# Altium PCB STM.PcbDoc
Units mm, origin at the board's own origin, x right, y up, seen from the top; angles counter-clockwise.
Board outline 35.75 x 36 mm, 4 copper layers (L1 (Signal), L2 (GND), L3 (GND), L4 (Signal)), stack 1.57 mm thick; 34 components, 27 nets, 170 pads, 116 vias.
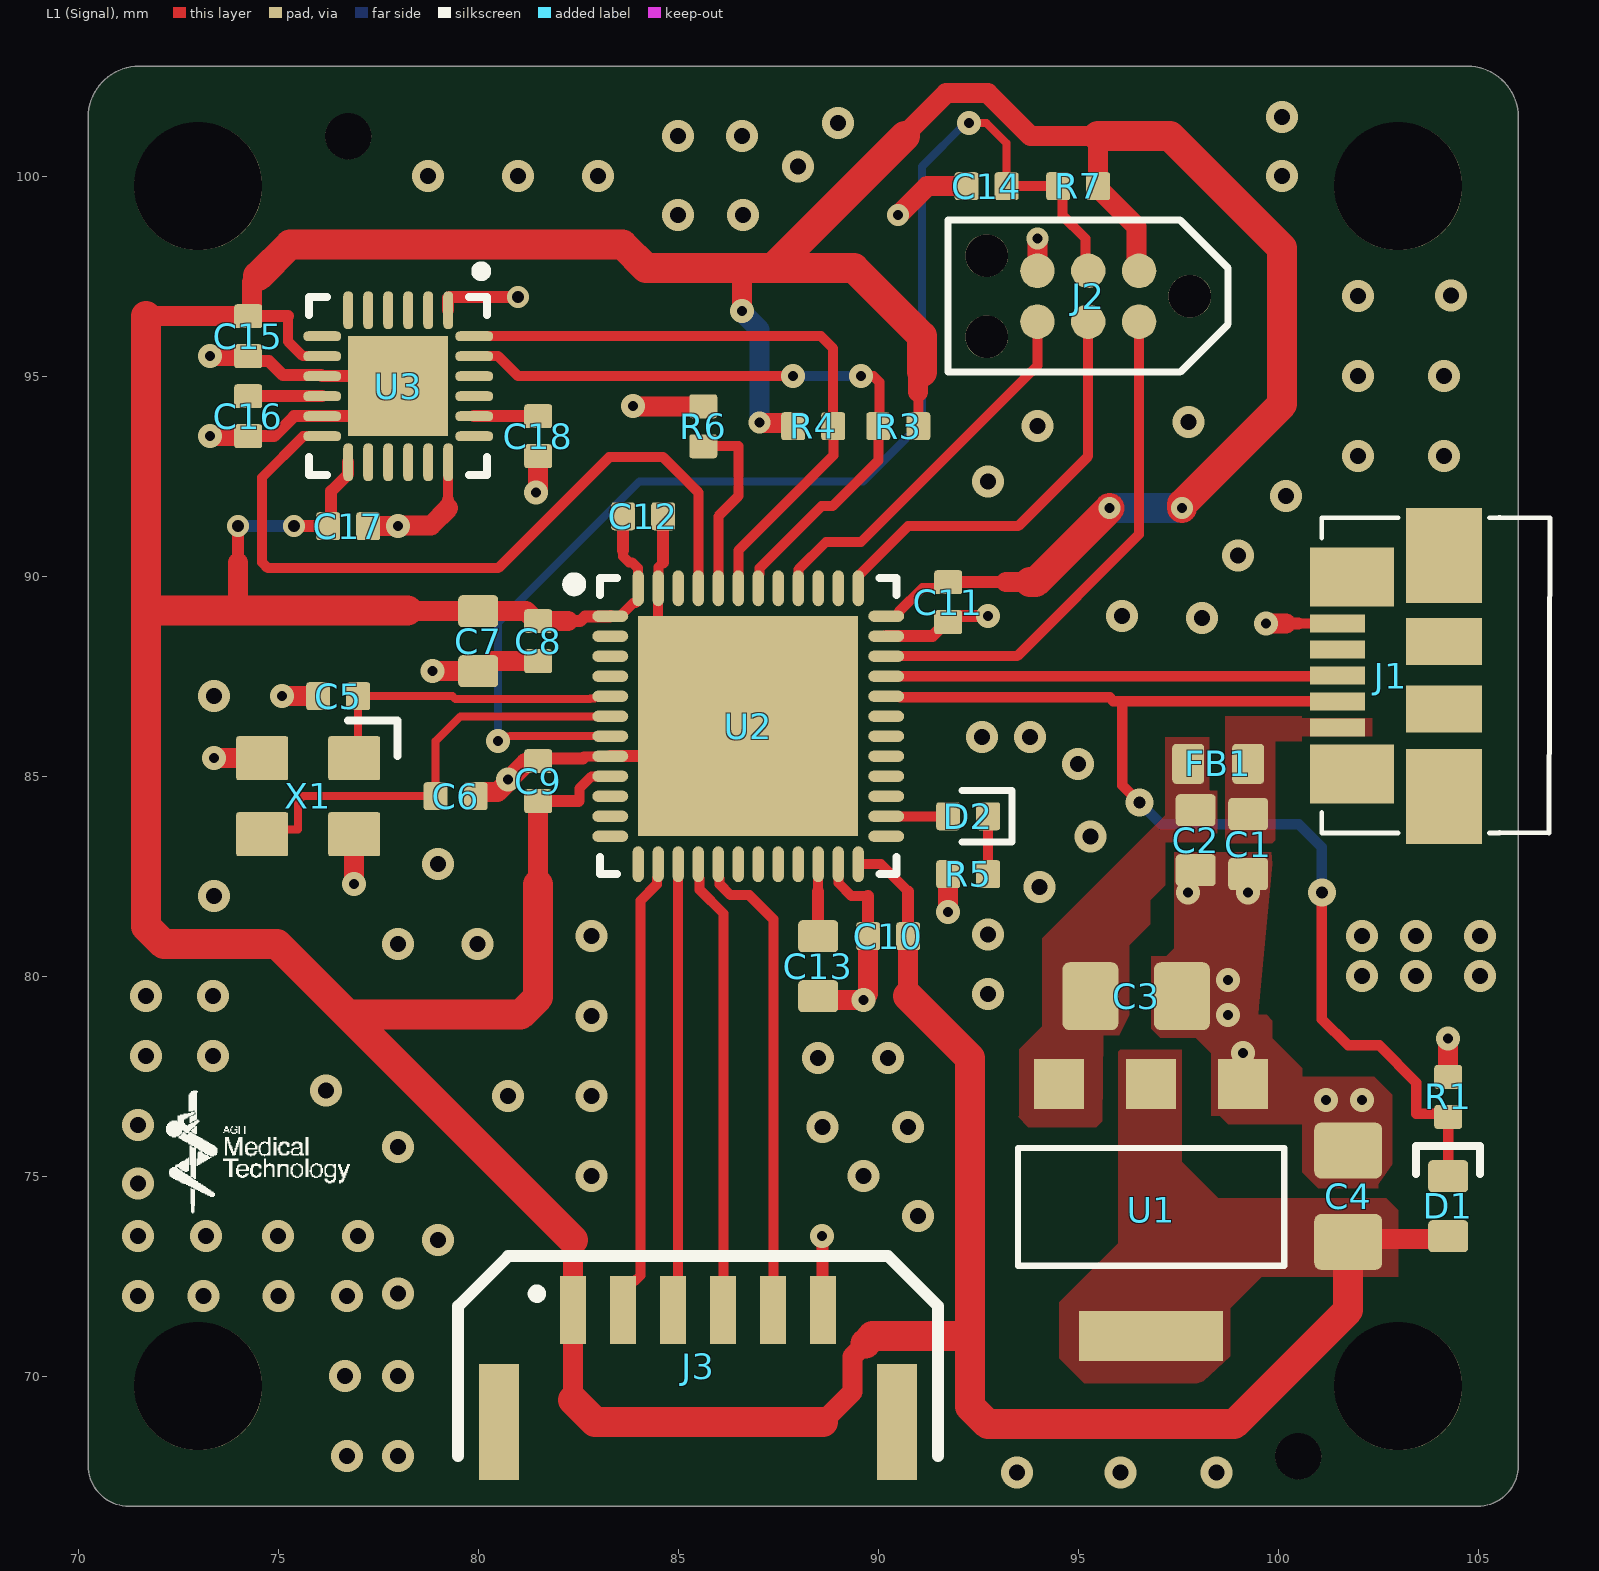
[diagram p0: L1 (Signal) view]
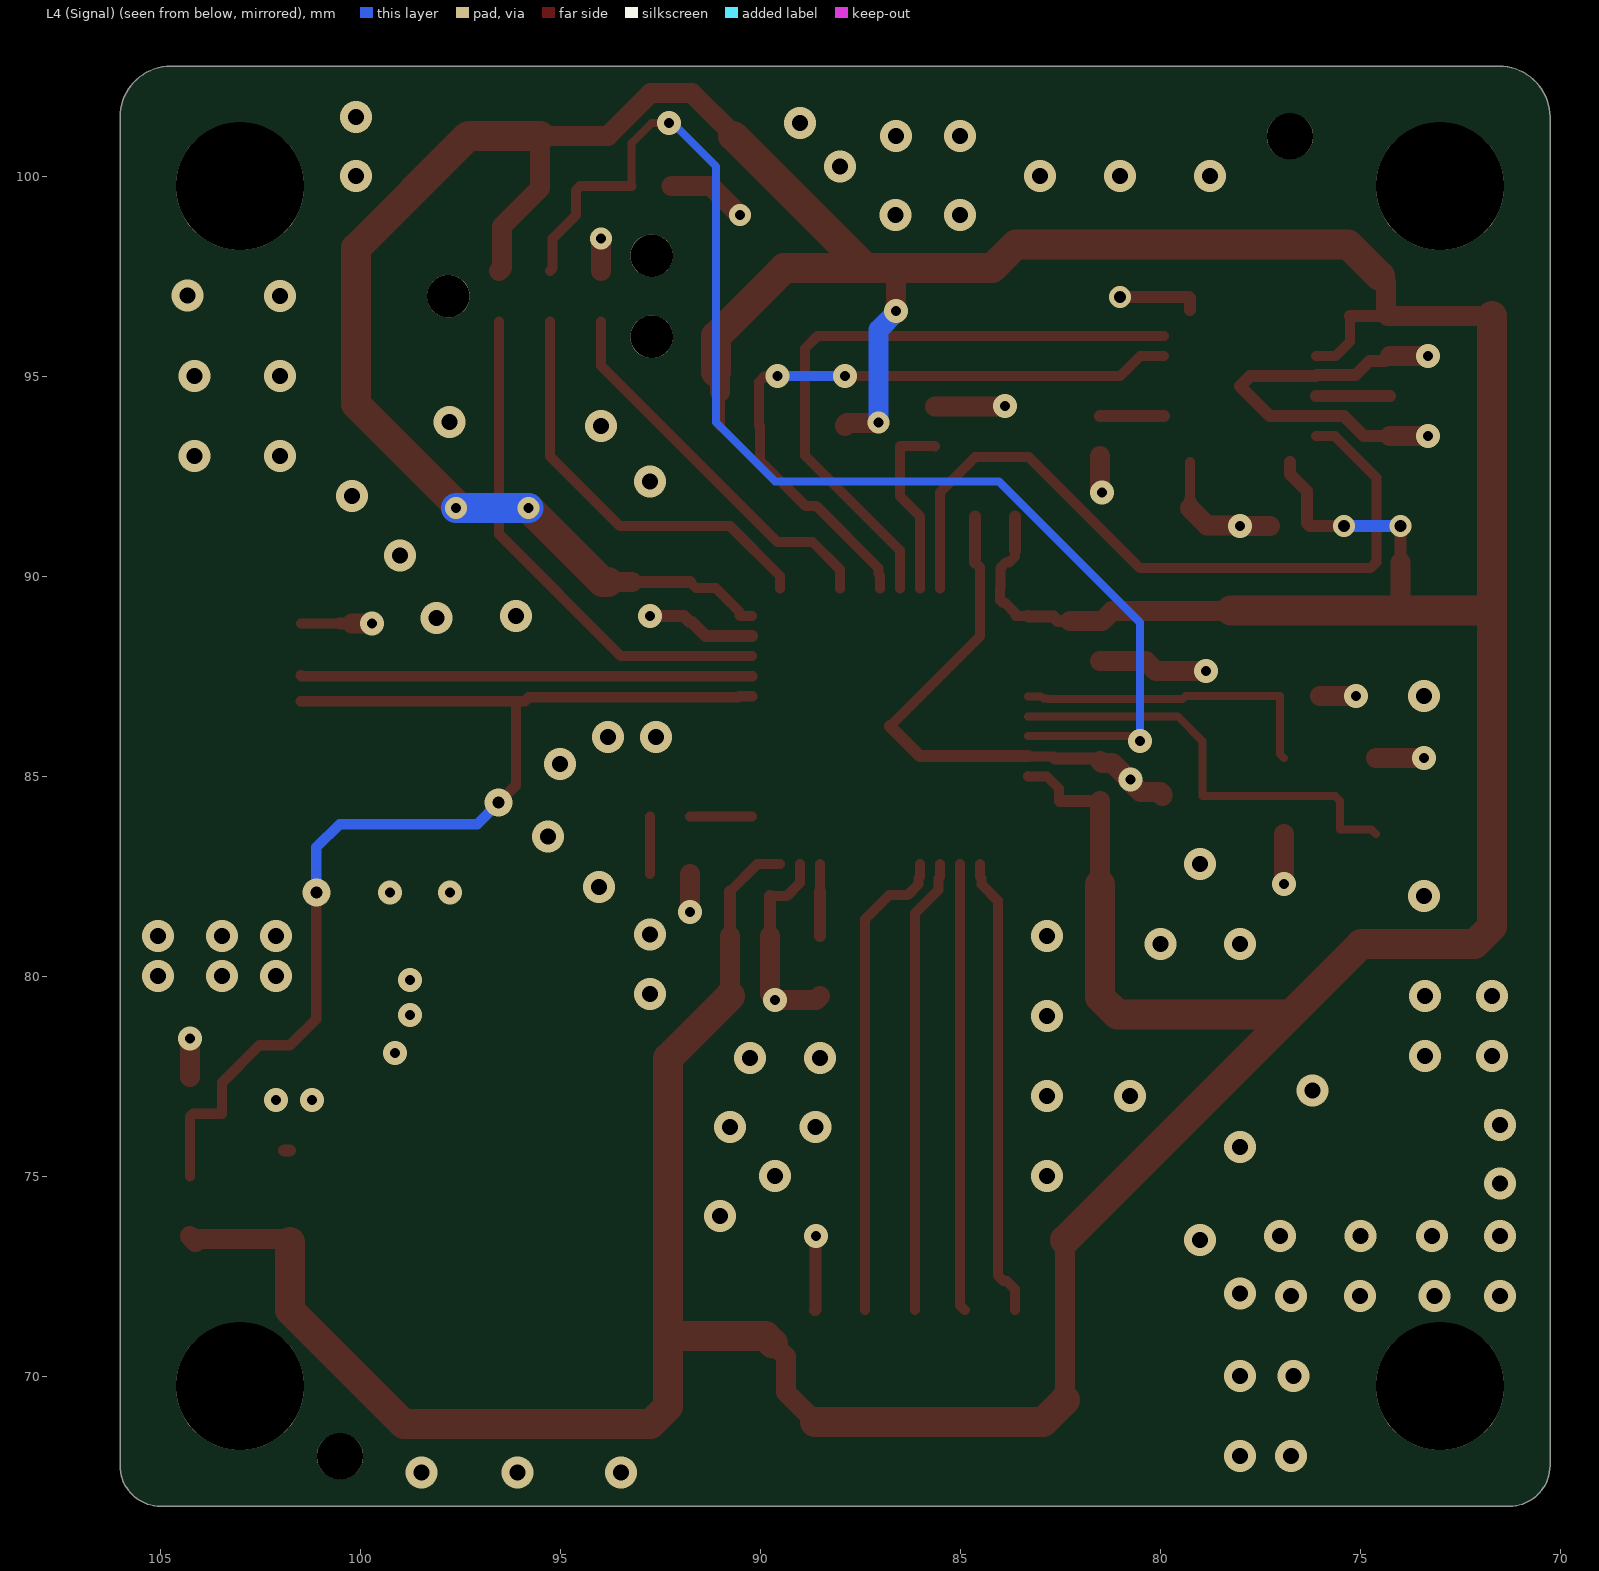
[diagram p1: L4 (Signal) view, seen from below]
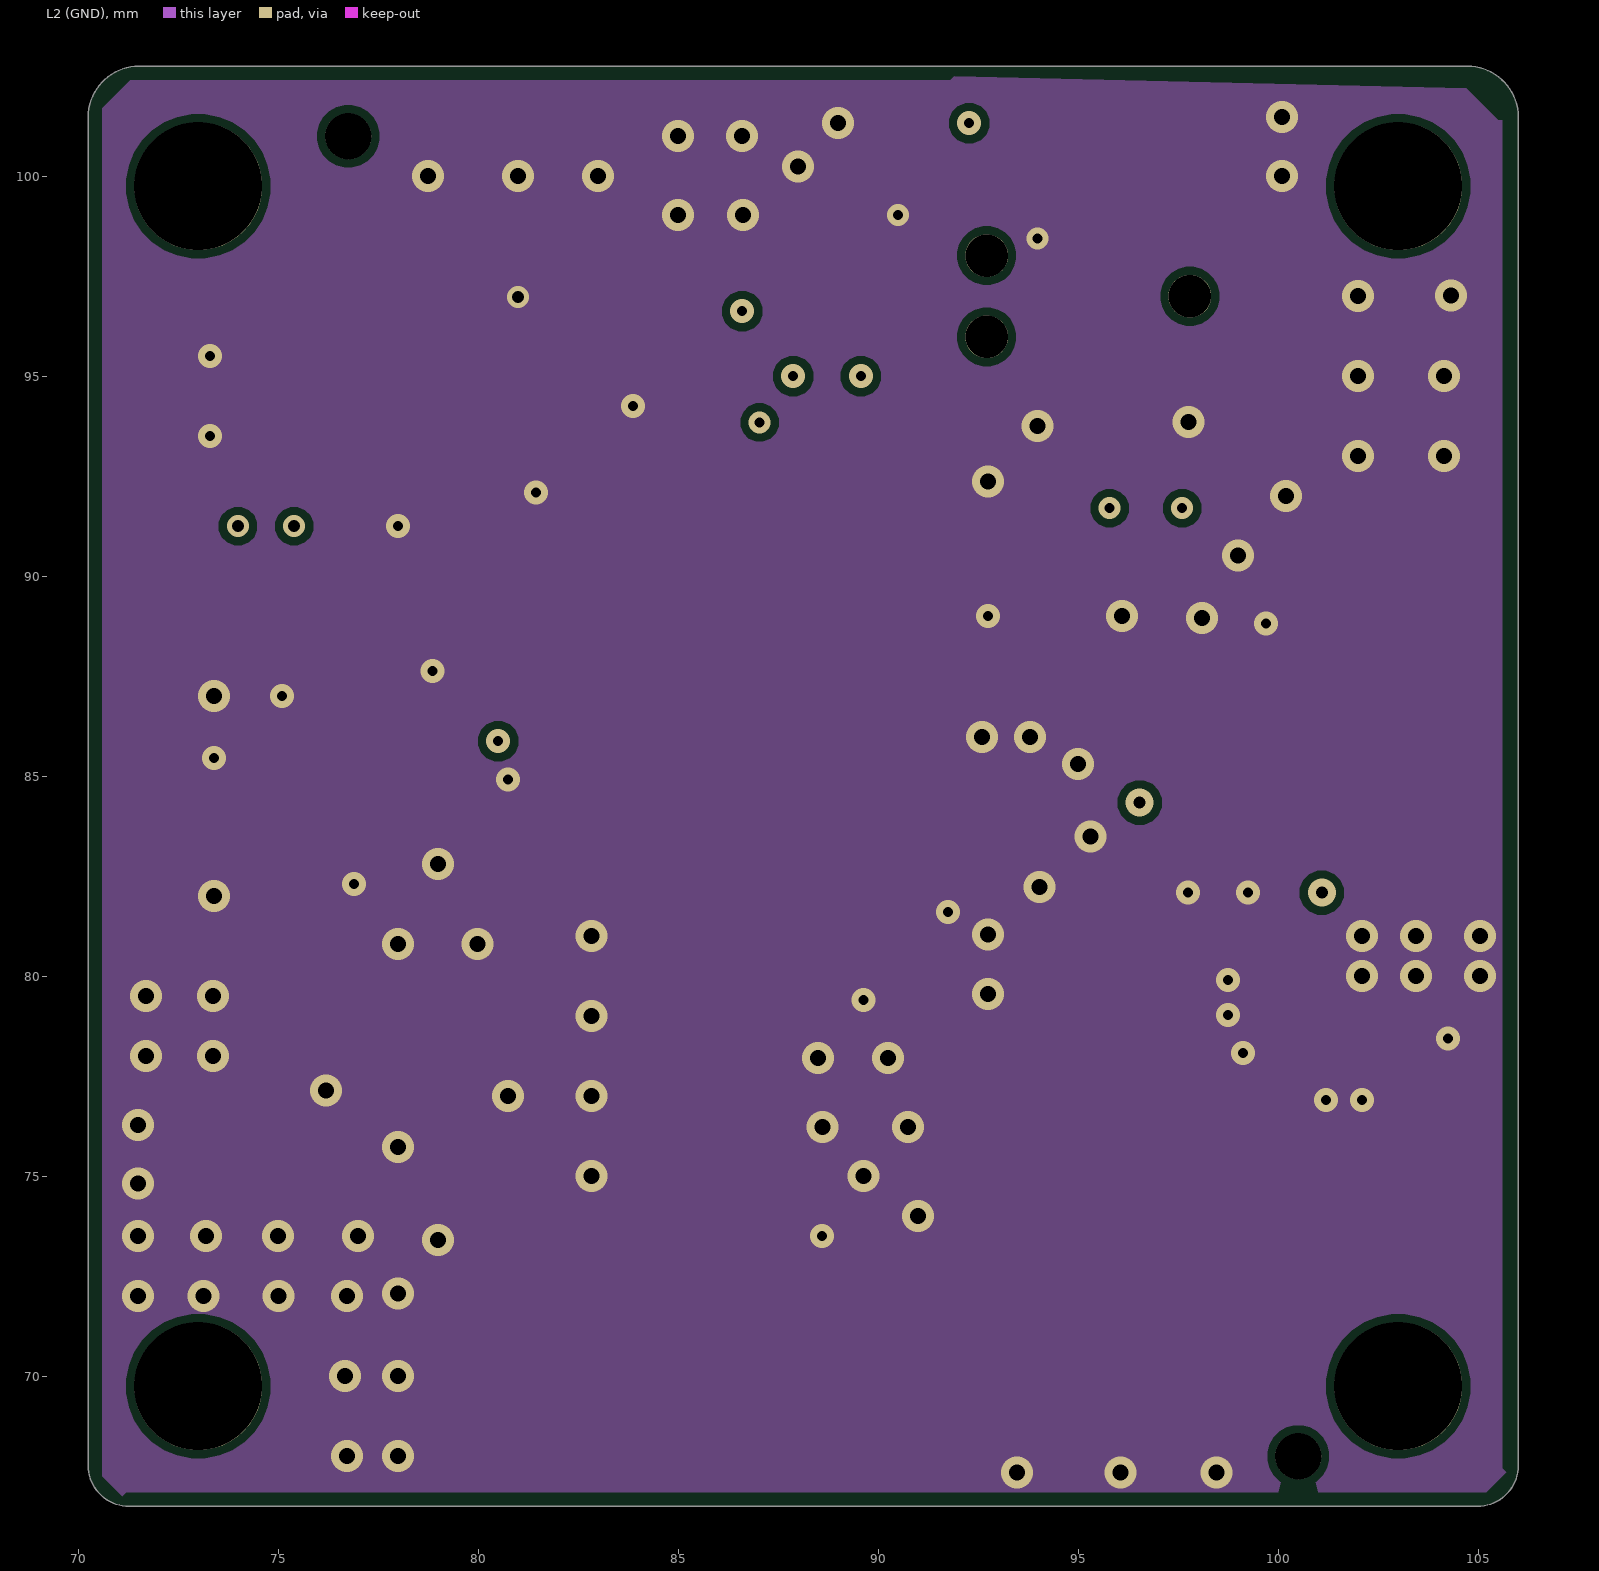
[diagram p2: L2 (GND)]
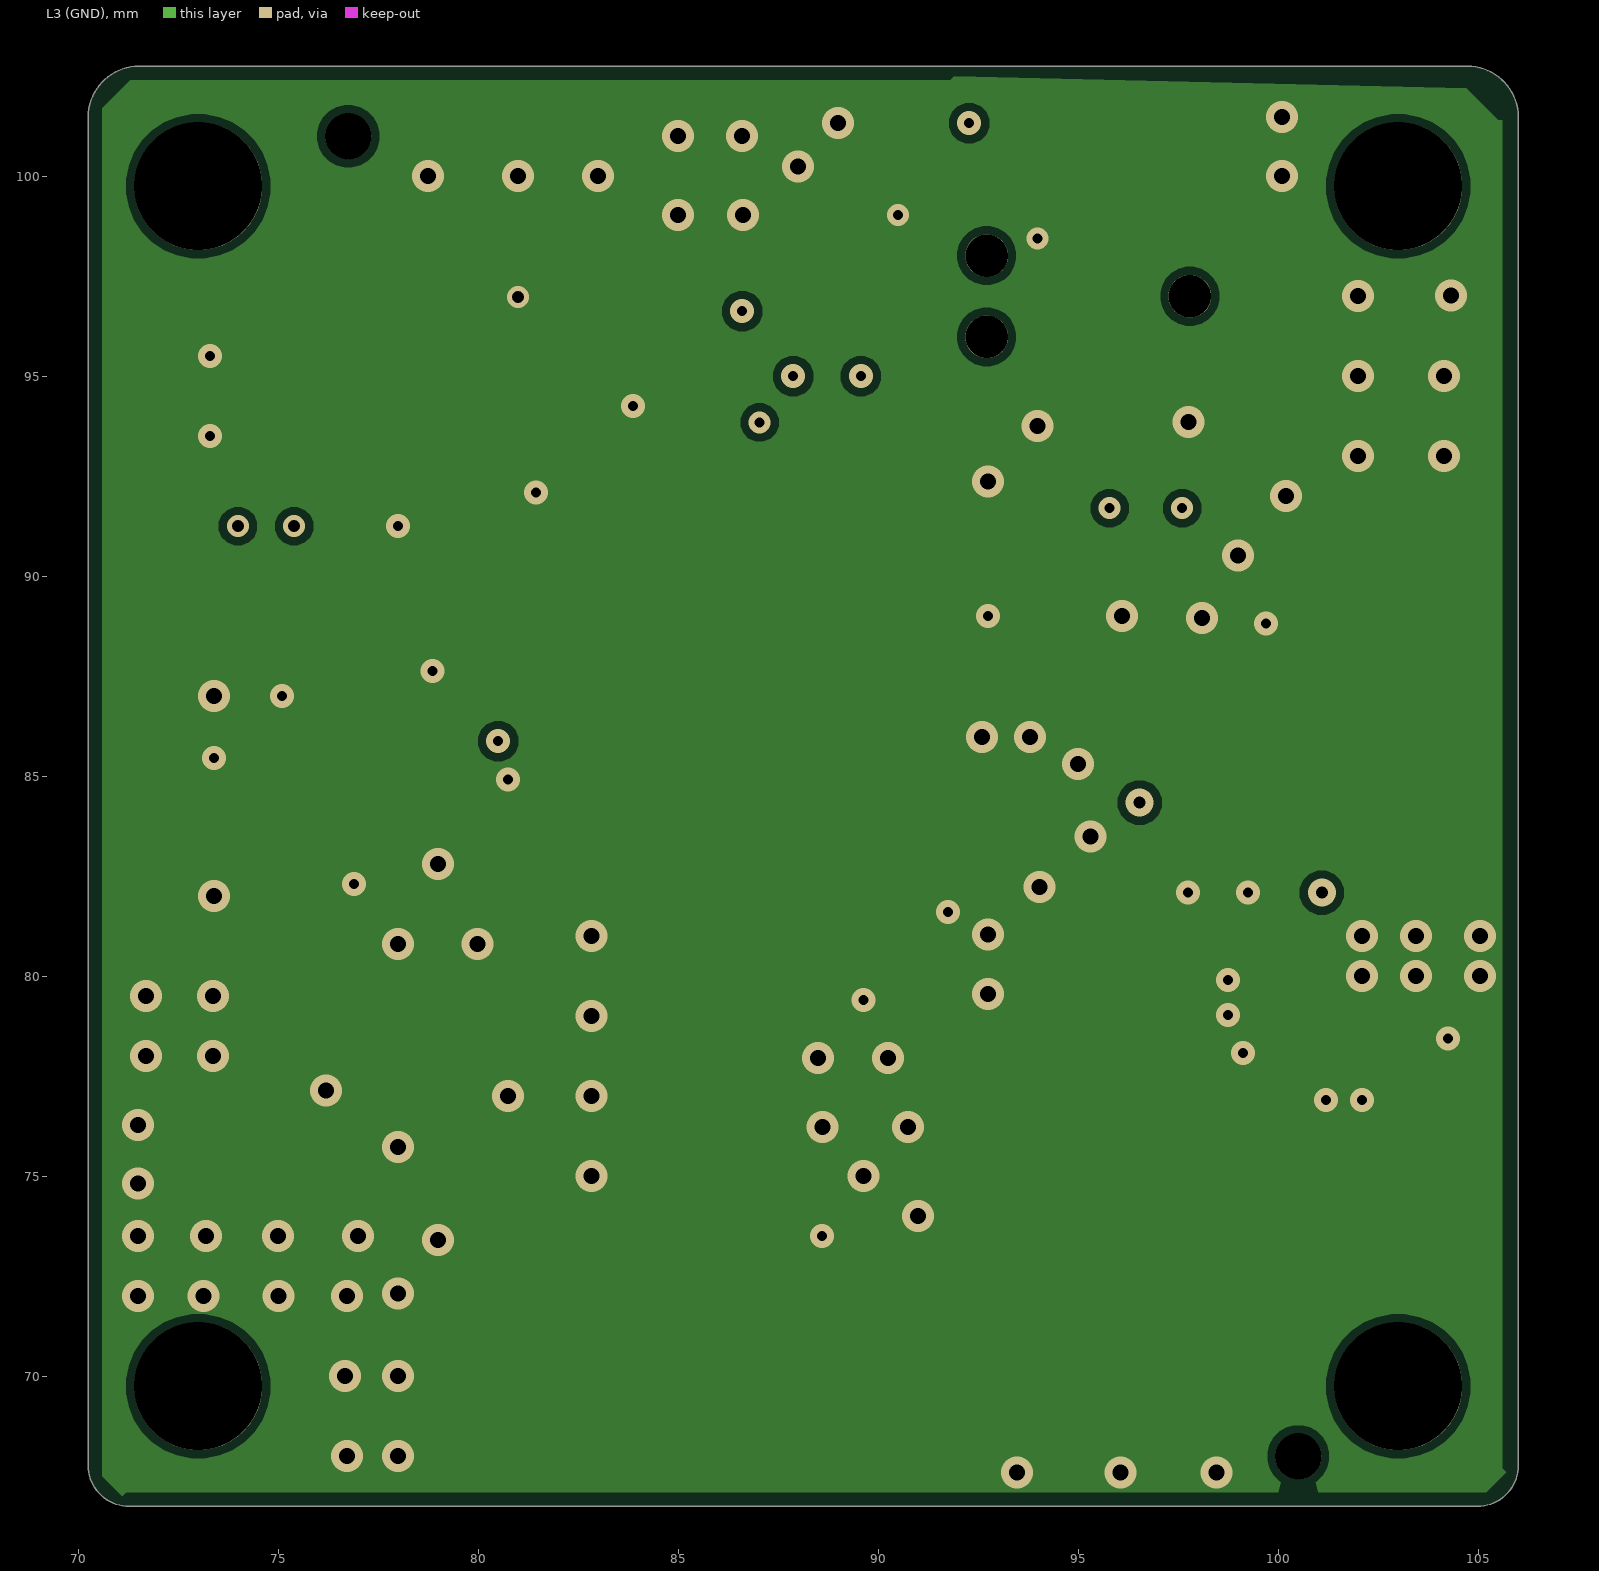
[diagram p3: L3 (GND)]
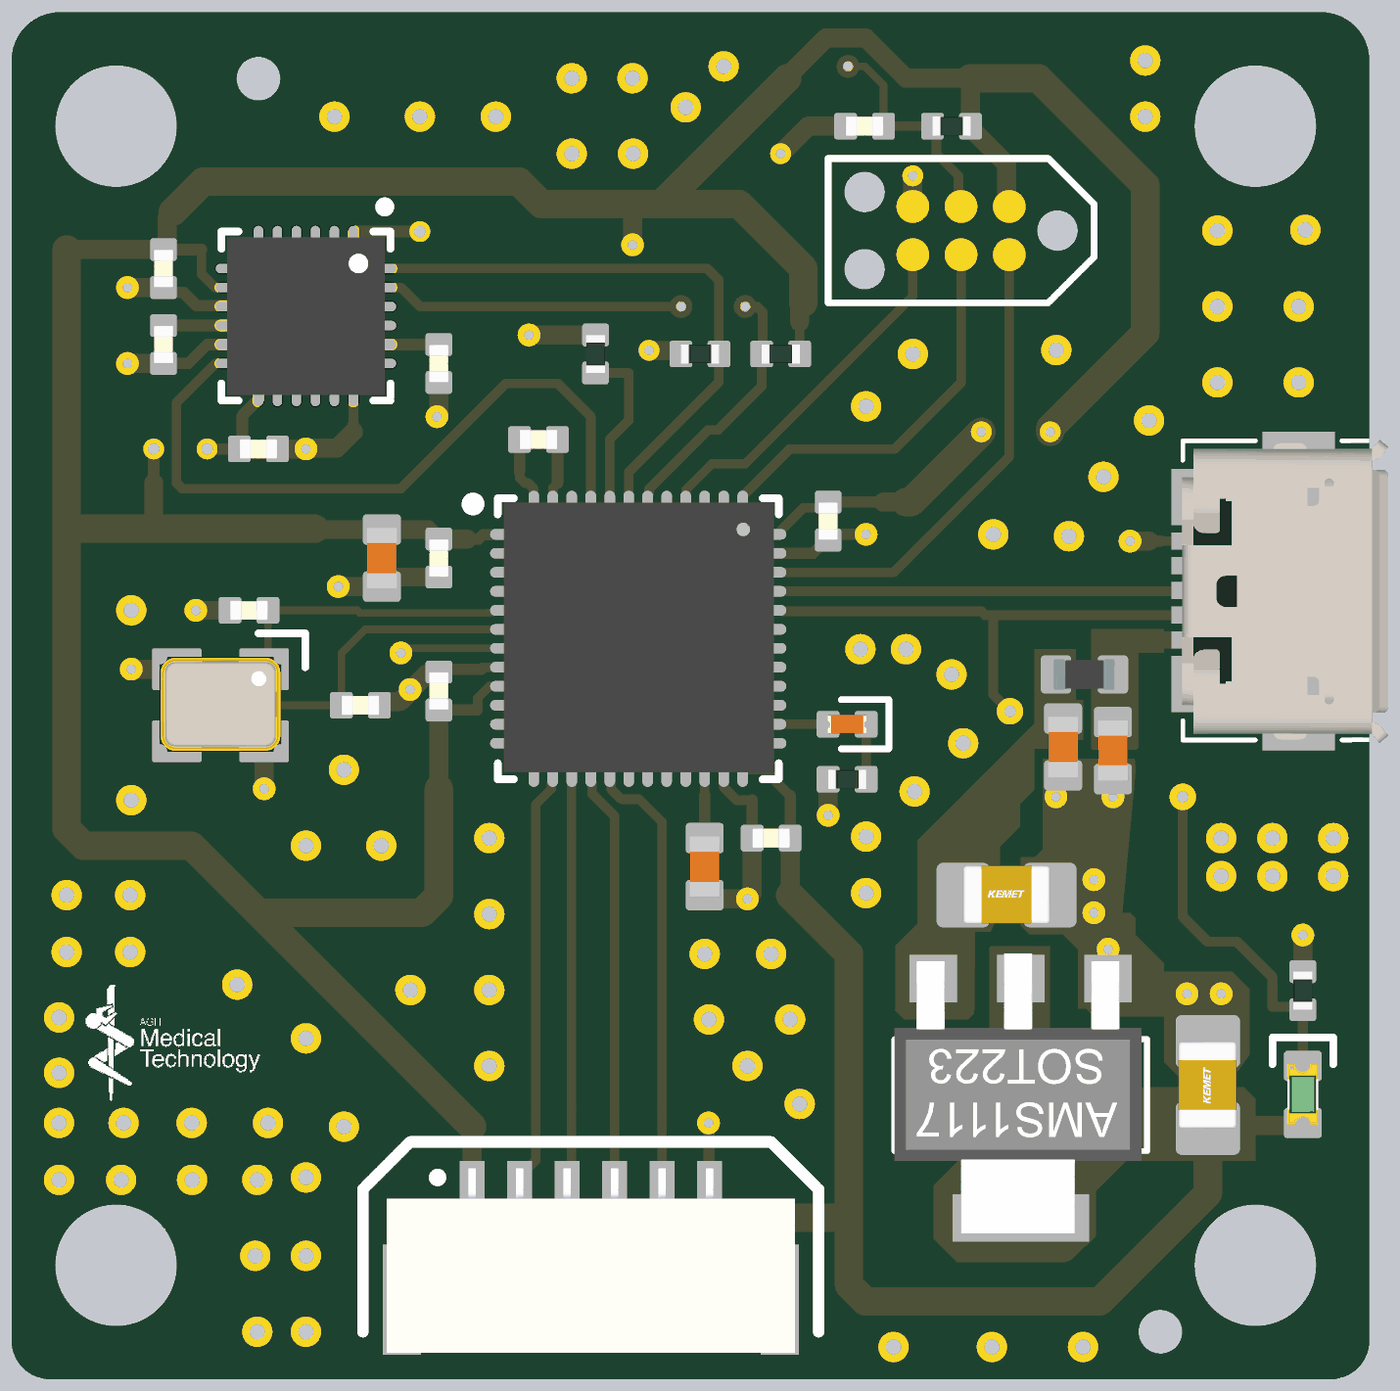
[diagram p4: 3D render of the assembled board from above, using the file's embedded part models]

## Layer stack, top to bottom
Top Solder: solder mask 0.0254, Solder Resist, Dk 4
L1 (Signal): signal copper 0.035
Dielectric 1: prepreg 0.2, PP-017, Dk 4.6
L2 (GND): signal copper 0.0175
Dielectric 3: core 1.065, Core-039, Dk 4.6
L3 (GND): signal copper 0.0175
Dielectric 5: prepreg 0.2, PP-017, Dk 4.6
L4 (Signal): signal copper 0.035
Bottom Solder: solder mask 0.0254, Solder Resist, Dk 4

## Board outline
70.25,67.77 ccw(c71.27,67.77) 71.27,66.75 104.98,66.75 ccw(c104.98,67.77) 106,67.77 106,101.48 ccw(c104.73,101.48) 104.73,102.75 71.52,102.75 ccw(c71.52,101.48) 70.25,101.48

## Design rules (kind name [scope] priority, off if disabled: settings)
Clearance [All] p1: gap=0.2 ignorepadtopadclearanceinfootprint=TRUE
DiffPairsRouting [All] p1: maxlimit=0.254 minlimit=0.2 mostfreqgap=0.254 toplayer_maxgap=0.2 toplayer_prefgap=0.2 toplayer_minwidth=0.261 toplayer_maxwidth=0.261 toplayer_prefwidth=0.261 bottomlayer_maxgap=0.2 bottomlayer_prefgap=0.2 bottomlayer_minwidth=0.261 bottomlayer_maxwidth=0.261 bottomlayer_prefwidth=0.261 impedanceprofiledriven=TRUE impedanceprofileid={22C61D4C-CBF5-4A2E-BE73-B86A736F0E75} impedanceprofilevalue=90.000000 maxuncoupledlength=12.7
HoleSize [All] p1: absolutevalues=TRUE maxlimit=3.3 minlimit=0.025 maxpercent=80.000 minpercent=20.000
MinimumSolderMaskSliver [All] p1: minsoldermaskwidth=0.1
PolygonConnect [All] p1: connectstyle=Direct reliefconductorwidth=0.254 reliefentries=4 polygonreliefangle="90 Angle" airgapwidth=0.254
RoutingVias [All] p1: holewidth=0.3 width=0.7 viastyle="Through Hole" minholewidth=0.25 minwidth=0.55 maxholewidth=0.4 maxwidth=0.9
SilkToSolderMaskClearance [IsPad] p1: minsilkscreentomaskgap=0.1 clearancetoexposedcopper=TRUE
SolderMaskExpansion [All] p1: expansion=0 istentingtop=FALSE
SupplyNets "Schematic Supply Nets_4" [InNet('+3V3')] p1: voltage=0.000
SupplyNets "Schematic Supply Nets_3" [InNet('3v3')] p2: voltage=0.000
SupplyNets "Schematic Supply Nets_2" [InNet('GND')] p3: voltage=0.000
SupplyNets "Schematic Supply Nets_1" [InNet('+5')] p4: voltage=0.000
SupplyNets "Schematic Supply Nets" [InNet('VBUS')] p5: voltage=0.000
Width [All] p1: maxlimit=1 minlimit=0.2 preferedwidth=0.3 midlayer1_minwidth=0.254 midlayer1_maxwidth=0.254 midlayer1_prefwidth=0.254 midlayer2_minwidth=0.254 midlayer2_maxwidth=0.254 midlayer2_prefwidth=0.254 minimp=50.000000 maximp=50.000000 favimp=50.000000
26 further rules are at their usual default settings.

## Classes and differential pairs
differential pair class DIFF_USB: USB_D
differential pair USB_D: +USB_D_P -USB_D_N

## Components (designator, comment, footprint, x,y, rotation, side; value= is the part's Value field where it differs from the comment)
C1 "2u2" CAP_0603 99.25,83.305 r90 top
C2 "2u2" CAP_0603 97.938,83.4 r90 top
C3 "22u" CAP_0805 96.448,79.5 r0 top
C4 "22u" CAP_0805 101.75,74.5 r90 top
C5 "10p" CAP_0402 76.5,87 r180 top
C6 "10p" CAP_0402 79.434,84.5 r0 top
C7 "2u2" CAP_0603 80,88.375 r90 top
C8 "100n" CAP_0402 81.5,88.375 r90 top
C9 "100n" CAP_0402 81.5,84.875 r270 top
C10 "100n" CAP_0402 90.25,81 r0 top
C11 "100n" CAP_0402 91.75,89.35 r90 top
C12 "100n" CAP_0402 84.124,91.499 r180 top
C13 "2u2" CAP_0603 88.5,80.25 r90 top
C14 "100n" CAP_0402 92.71,99.75 r0 top
C15 "100n" CAP_0402 74.25,96 r90 top
C16 "100n" CAP_0402 74.25,94 r90 top
C17 "100n" CAP_0402 76.75,91.25 r180 top
C18 "2n2" CAP_0402 81.5,93.5 r90 top
D1 "GREEN" LED_0603_GREEN 104.25,74.25 r270 top
D2 "RED" LED_0402_RED 92.25,84 r0 top
FB1 "240R" FB_0603 98.5,85.311 r0 top
J1 "473460001" MICRO-USB-SMD_47346-0001 104,87.5 r90 top
J2 "TC2030-NL" TC2030-NL-FP 95.25,97 r180 top
J3 "SM06B-GHS-TB" SM06B-GHS-TB 85.5,70.25 r0 top
R1 "1k" RES_0402 104.25,76.983 r270 top
R3 "2k2" RES_0402 90.501,93.75 r180 top
R4 "2k2" RES_0402 88.375,93.75 r0 top
R5 "1k" RES_0402 92.25,82.55 r180 top
R6 "10k" RES_0402 85.625,93.75 r90 top
R7 "10k" RES_0402 95,99.75 r180 top
U1 "AMS1117-3.3" SOT-223-3_L6.5-W3.4-P2.30-LS7.0-BR 96.75,74.25 r90 top
U2 "STM32F411CEU6" UFQFPN-48_L7.0-W7.0-P0.50-BL-EP 86.75,86.25 r270 top
U3 "MPU-6050" QFN-24 78,94.75 r270 top
X1 "24MHz" XTAL_3225 75.75,84.5 r180 top

## Footprints (in the part's own frame and the unit in brackets; to place one, negate y for a bottom-side part, rotate by r counter-clockwise, add the part's x,y. Pads: shape width x height; smd on the part's side, far side on the other; paste and mask are expansions set on the pad)
CAP_0402 [mm]
  rrect25% 0.6x0.7 smd: 1(-0.5,0) 2(0.5,0)
  body extent -0.5,-0.26 0.5,0.26, height 0.37
CAP_0603 [mm]
  rrect25% 0.8x1 smd: 1(-0.75,0) 2(0.75,0)
  body extent -0.8,-0.4 0.8,0.4, height 0.51
CAP_0805 [mm]
  rrect25% 1.4x1.7 smd: 1(-1.143,0) 2(1.143,0)
  body extent -1.15,-0.76 1.15,0.79, height 1.01
FB_0603 [mm]
  rrect25% 0.8x1 smd: 1(-0.75,0) 2(0.75,0)
  body extent -0.8,-0.4 0.8,0.4, height 0.81
LED_0402_RED [mm]
  rrect25% 0.6x0.7 smd: A(-0.5,0) K(0.5,0)
  silkscreen extent -0.15,-0.65 1.1,0.65, body extent -0.51,-0.25 0.51,0.25, height 0.45
LED_0603_GREEN [mm]
  rrect25% 0.8x1 smd: A(0.75,0) K(-0.75,0)
  silkscreen extent -1.5,-0.8 -0.8,0.8, body extent -0.8,-0.4 0.8,0.4, height 0.6
MICRO-USB-SMD_47346-0001 [mm]
  rect 0.45x1.38 smd: 1(-1.277,2.52) 2(-0.627,2.52) 3(0.023,2.519) 4(0.673,2.52) 5(1.323,2.52)
  rect 2.375x1.9 smd: 6(-3.003,-0.14) 6(3.015,-0.14)
  rect 1.475x2.1 smd: 6(-2.439,2.16) 6(2.486,2.16)
  rect 1.175x1.9 smd: 6(-0.817,-0.14) 6(0.863,-0.14)
  silkscreen extent -3.92,-2.79 3.97,2.91, body extent -3.99,-2.5 3.99,2.93, height 2.73
QFN-24 [mm] "QFN, 24-Leads, Body 4.00x4.00mm, Pitch 0.50mm, Thermal Pad 2.50x2.50mm, IPC Medium Density"
  oval 0.95x0.25 smd mask+0.03: 1(-1.9,1.25) 2(-1.9,0.75) 3(-1.9,0.25) 4(-1.9,-0.25) 5(-1.9,-0.75) 6(-1.9,-1.25) 13(1.9,-1.25) 14(1.9,-0.75) 15(1.9,-0.25) 16(1.9,0.25) 17(1.9,0.75) 18(1.9,1.25)
  oval 0.25x0.95 smd mask+0.03: 7(-1.25,-1.9) 8(-0.75,-1.9) 9(-0.25,-1.9) 10(0.25,-1.9) 11(0.75,-1.9) 12(1.25,-1.9) 19(1.25,1.9) 20(0.75,1.9) 21(0.25,1.9) 22(-0.25,1.9) 23(-0.75,1.9) 24(-1.25,1.9)
  rect 2.5x2.5 smd mask+0.03: 25(0,0)
  silkscreen extent -3,-2.23 2.23,2.22, body extent -2.08,-2.08 2.08,2.08, height 1
RES_0402 [mm]
  rrect25% 0.6x0.7 smd: 1(-0.5,0) 2(0.5,0)
  body extent -0.5,-0.25 0.5,0.25, height 0.3
SM06B-GHS-TB [mm]
  rect 0.65x1.7 smd: 1(-3.125,1.4) 2(-1.875,1.4) 3(-0.625,1.4) 4(0.625,1.4) 5(1.875,1.4) 6(3.125,1.4)
  rect 1x2.9 smd: ""(-4.975,-1.4) ""(4.975,-1.4)
  silkscreen extent -6,-2.25 6,2.75, body extent -5.38,-2.8 5.38,2.05, height 4.26
SOT-223-3_L6.5-W3.4-P2.30-LS7.0-BR [mm]
  rect 1.25x1.25 smd: 1(3.053,-2.373) 2(3.053,-0.073) 3(3.053,2.227)
  rect 1.25x3.6 smd: 4(-3.25,-0.073)
  silkscreen extent -1.49,-3.4 1.45,3.25, body extent -3.66,-3.25 3.71,3.25, height 1.8
TC2030-NL-FP [mil]
  round 33.98 smd paste-16.99: 1(-50,-25) 2(-50,25) 3(0,-25) 4(0,25) 5(50,-25) 6(50,25)
  round 42.01 hole 42.01 unplated: MH(-100,0) MH(100,-40) MH(100,40)
  silkscreen extent -138,-75 138,75
UFQFPN-48_L7.0-W7.0-P0.50-BL-EP [mm]
  oval 0.28x0.9 smd: 1(-2.751,-3.449) 2(-2.25,-3.449) 3(-1.75,-3.449) 4(-1.25,-3.449) 5(-0.749,-3.449) 6(-0.249,-3.449) 7(0.249,-3.449) 8(0.749,-3.449) 9(1.25,-3.449) 10(1.75,-3.449) 11(2.25,-3.449) 12(2.751,-3.449) 25(2.751,3.449) 26(2.25,3.449) 27(1.75,3.449) 28(1.25,3.449) 29(0.749,3.449) 30(0.249,3.449) 31(-0.249,3.449) 32(-0.749,3.449) 33(-1.25,3.449) 34(-1.75,3.449) 35(-2.25,3.449) 36(-2.751,3.449)
  oval 0.9x0.28 smd: 13(3.449,-2.751) 14(3.449,-2.25) 15(3.449,-1.75) 16(3.449,-1.25) 17(3.449,-0.749) 18(3.449,-0.249) 19(3.449,0.249) 20(3.449,0.749) 21(3.449,1.25) 22(3.449,1.75) 23(3.449,2.25) 24(3.449,2.751) 37(-3.449,2.751) 38(-3.449,2.25) 39(-3.449,1.75) 40(-3.449,1.25) 41(-3.449,0.749) 42(-3.449,0.249) 43(-3.449,-0.249) 44(-3.449,-0.749) 45(-3.449,-1.25) 46(-3.449,-1.75) 47(-3.449,-2.25) 48(-3.449,-2.751)
  rect 5.5x5.5 smd: 49(0,0)
  silkscreen extent -3.7,-4.5 3.7,3.7, body extent -3.59,-3.54 3.52,3.57, height 0.61
XTAL_3225 [mm]
  rrect10% 1.3x1.1 smd: 1(-1.15,-0.95) 2(1.15,-0.95) 3(1.15,0.95) 4(-1.15,0.95)
  silkscreen extent -2.23,-1.89 -1,-1, body extent -1.6,-1.28 1.6,1.22, height 0.61

## Part data
C1 C2 C7 C13: library part CAP_0603, "Capacitor SMD 0603"
C3 C4: library part CAP_0805, "Capacitor SMD 0805"
C5 C6 C8 C9 C10 C11 C12 C14 C15 C16 C17 C18: library part CAP_0402, "Capacitor SMD 0402"
D1: library part LED_0603_GREEN, "LED 0603 GREEN SMD"
D2: library part LED_0402_RED, "LED 0402 RED SMD"
FB1: library part FB_0603, "Ferrite Bead SMD 0603"
J1: Current Rating - Power (Max)=1A, JLCPCB Part Class="Extended Part", LCSC Part Name="Micro-B 母", Manufacturer=MOLEX, Operating Temperature Range=-, Add into BOM=yes, Connector Type=Micro-B, Contact Material=-, Contact Plating=-, Convert to PCB=yes, Datasheet=https://atta.szlcsc.com/upload/public/pdf/source/20170925/C132560_1506321702749990501.pdf, Device=473460001, Gender=Female, Manufacturer Part=473460001, Mounting Style=-, Number of Contacts=5P, Number of Ports=1, Soldering Temperature(Max)=-, Standard="USB 2.0", Supplier=LCSC, Supplier Footprint=SMD, Supplier Part=C132560, Symbol=47346-0001
J2: "Tag-Connect No-Solder SWD Debug Connector (No Legs) DO NOT PLACE", Manufacturer=Tag-Connect, Manufacturer Part Number=TC2030-NL-FP
J3: "Header Connector 6 Position 1.25MM Pitch SMD Horizontal JST GH", Manufacturer=JST, Manufacturer Part Number=SM06B-GHS-TB
R1 R3 R4 R5 R6 R7: library part RES_0402, "Resistor SMD 0402"
U1: library part AMS1117-3.3_C6186, JLCPCB Part Class="Basic Part", LCSC Part Name="输出3.3V 1A", Manufacturer=AMS, Operating Temperature=-, Output Current=1A, Output Voltage=3.3V, Power Supply Rejection Ratio (PSRR)=72dB@(120Hz), Voltage Dropout=1.3V@(800mA), Add into BOM=yes, Convert to PCB=yes, Datasheet=https://atta.szlcsc.com/upload/public/pdf/source/20180727/C6186_7A095716F0823C02F1997A905E26C086.pdf, Device=AMS1117-3.3_C6186, Features="Overcurrent Protection(OCP)；热关断(TSD)", Manufacturer Part=AMS1117-3.3, Noise=-, Number of Outputs=1, Output Configuration="Positive electrode", Output Type=Fixed, standby current=-, Supplier=LCSC, Supplier Footprint=SOT-223, Supplier Part=C6186, Symbol=AMS1117-3.3, Voltage - Supply=-
U2: JLCPCB Part Class="Extended Part", LCSC Part Name="带DSP和FPU的高性能基本型系列ARM Cortex-M4 MCU，具有512 KB Flash、100 MHz CPU和ART加速器", Low Voltage Detection Threshold=1.7V~3.6V, Manufacturer=ST(意法半导体), ADC (Bit)=12bit, Add into BOM=yes, Application Area=-, Convert to PCB=yes, CPU Core=ARM-M4, CPU Maximum Speed=100MHz, Datasheet=https://atta.szlcsc.com/upload/public/pdf/source/20151026/1457707507170.pdf, Device=STM32F411CEU6, Manufacturer Part=STM32F411CEU6, Number of I/O=36, Program Memory Type=FLASH, Program Storage Size=512KB, Supplier=LCSC, Supplier Footprint=UFQFPN-48(7x7), Supplier Part=C60420, Symbol=STM32F411CEU6
U3: JLCPCB Part Class="Extended Part", Manufacturer="TDK InvenSense(应美盛)", Operating Temperature=-40℃~+85℃, Add into BOM=yes, Convert to PCB=yes, Datasheet=https://atta.szlcsc.com/upload/public/pdf/source/20140425/1457707046159.pdf, Device=MPU-6050, LCSC Part Name=MPU-6050, Manufacturer Part=MPU-6050, Sensor Type=加速度计陀螺仪, Supplier=LCSC, Supplier Footprint=QFN-24-EP(4x4), Supplier Part=C24112, Symbol=MPU-6050_C24112
X1: library part TSX-3225_24.0000MF15X-AC, "Crystal SMD 24MHz 10PPM 7pF 3225", Manufacturer=Epson, Manufacturer Part Number="TSX-3225 24.0000MF15X-AC"

## Free pads (board coordinates)
  round 3.2 hole 3.2 unplated: MH(73,69.75) MH(73,99.75) MH(103,69.75) MH(103,99.75)
  round 1.152 hole 1.152 unplated: TH(76.75,101) TH(100.5,68)

## Via types
v1: diameter 0.8, hole 0.4, L1 (Signal) to L4 (Signal), 78 vias
v2: diameter 0.6, hole 0.25, L1 (Signal) to L4 (Signal), 28 vias
v3: diameter 0.55, hole 0.25, L1 (Signal) to L4 (Signal), 5 vias
v4: diameter 0.55, hole 0.3, L1 (Signal) to L4 (Signal), 3 vias
v5: diameter 0.7, hole 0.3, L1 (Signal) to L4 (Signal), 2 vias

## Nets (pads, with @x,y where several pads share a name; then routed paths per layer and width w, separated by ;. In a path a pad name is that pad's centre, name@x,y a point inside that pad or via, vN(x,y) a via of type N, cw(c..) or ccw(c..) an arc to the next point about the centre after c; other vN are vias at no path point)
+3V3: C4.1 C7.2 C8.2 C9.2 C10.2 C11.2 C12.2 C15.2 C17.2 D1.A J2.1 J3.1 R3.1 R4.1 R7.1 U1.2 U1.4 U2.1 U2.9 U2.24 U2.36 U2.48 U3.8 U3.13 | length 175.9
  L1 (Signal) w0.25: 75.25,96.5 75.25,95.864 75.614,95.5 U3.8 ; C8.2 C8.2@81.625,89.001 ; 82.501,84.375 82.526,84.4 82.526,84.693 82.828,84.995 83.295,84.995 U2.9 ; U2.1 83.603,89.001 83.616,89.015 83.616,89.076 83.865,89.325 83.927,89.325 83.999,89.397 U2.48 83.993,89.705 83.993,90.202 83.847,90.348 83.771,90.348 83.624,90.495 83.624,90.647 ; U2.24 90.069,82.801 90.75,82.12 ; U2.36 90.501,89.001 90.515,89.015 90.515,89.113 91.106,89.703 91.604,89.703 C11.2 ; R3.1 91.001,94.599 91,94.6 ; C4.1 101.821,73.428 C4.1@101.893,73.5
  L1 (Signal) w0.3: 73.992,90.348 v4(73.992,91.25) ; C15.2 74.3,96.5 75.25,96.5 ; v4(75.399,91.25) C17.2 76.325,91.325 76.325,92.125 76.75,92.55 U3.13 ; C9.2 82.501,84.375 ; 82.249,88.875 82.549,88.875 82.664,88.991 83.291,88.991 U2.1 ; 83.624,90.647 C12.2 ; C10.2 90.75,82.12 ; C11.2 93.2,89.85
  L1 (Signal) w0.5: 71.7,96.503 C15.2@74.247,96.503 ; 73.992,89.147 73.992,90.348 ; C15.2@74.3,96.5 74.35,96.55 74.35,97.35 74.5,97.5 ; 78.25,89.126 C7.2 81.2,89.125 81.45,88.875 C8.2 82.249,88.875 ; 81.5,82.298 C9.2 ; 82.375,69.4 J3.1 82.375,73.4 ; v2(86.6,96.625) 86.6,97.7 ; v3(87.034,93.846) 87.044,93.837 87.825,93.837 87.875,93.787 R4.1 ; 88.625,68.85 88.625,68.877 89.351,69.603 89.351,70.489 89.681,70.819 ; 90.672,101.049 91.699,102.075 92.738,102.075 93.801,101.012 95.497,101.012 ; 90.75,79.5 C10.2 ; 91,94.6 91,95.005 91.095,95.1 ; 93.2,89.85 93.8,89.85 ; 95.5,101.009 R7.1 95.5,99.7 96.451,98.749 96.451,97.704 J2.1 ; C4.1@101.821,73.428 D1.A@104.179,73.428 ; D1.A@104.107,73.357 D1.A@104.179,73.428 ; D1.A D1.A@104.179,73.428
  L1 (Signal) w0.75: 71.7,96.503 71.7,89.147 ; 74.5,97.5 75.294,98.294 83.606,98.294 84.2,97.7 86.6,97.7 87.361,97.7 ; 78.228,89.147 73.992,89.147 71.7,89.147 ; 81.5,82.298 81.5,79.477 81.061,79.038 76.737,79.038 ; 82.375,69.4 82.925,68.85 88.625,68.85 ; 82.375,73.4 76.737,79.038 ; 89.681,70.819 89.862,71 92.3,71 ; 90.672,101.012 87.361,97.7 ; 90.75,79.5 92.3,77.95 92.3,71 ; 91.095,95.1 91.095,96 89.395,97.7 87.361,97.7 ; 93.8,89.85 93.934,89.85 v3(95.785,91.7) ; 95.5,101.009 97.291,101.009 100.1,98.2 100.1,94.3 97.6,91.8 v3(97.6,91.7) ; C4.1 101.75,71.65 98.9,68.8 92.739,68.8 92.3,69.239 92.3,71 ; 71.7,89.147 71.7,81.239 72.139,80.8 74.975,80.8 76.737,79.038
  L4 (Signal) w0.25: v2(86.6,96.625) v2@86.613,96.612
  L4 (Signal) w0.3: v4(73.992,91.25) v4(75.399,91.25)
  L4 (Signal) w0.5: v2(86.6,96.625) 86.6,96.598 87.034,96.164 v3(87.034,93.846)
  L4 (Signal) w0.75: v3(95.785,91.7) v3(97.6,91.7)
+5: C2.2 C3.1 FB1.1 U1.3
GND: C1.1 C2.1 C3.2 C4.2 C5.2 C6.2 C7.1 C8.1 C9.1 C10.1 C11.1 C12.1 C13.1 C14.1 C15.1 C16.1 C17.1 C18.1 J1.5 J2.5 J3.6 R1.1 R5.2 R6.2 U1.1 U2.8 U2.23 U2.35 U2.47 U2.49 U3.1 U3.9 U3.11 U3.18 U3.25 X1.2 X1.4 | length 54.7
  L1 (Signal) w0.25: 79.25,91.9 U3.18 ; 82.646,85.472 82.669,85.495 83.295,85.495 U2.8 ; 84.624,90.348 84.505,90.23 84.505,89.705 U2.47 84.5,88.5 U2.49 ; U2.23 89.006,82.795 89.006,82.328 89.334,82 89.75,82 ; 100.51,88.823 J1.5
  L1 (Signal) w0.3: C16.1 74.899,93.5 75.399,94 U3.11 77.25,94 U3.25 77.75,95 U3.9 76.075,95.025 75.118,95.025 74.768,95.376 74.374,95.376 C15.1 ; 79.25,91.7 79.25,91.9 ; U3.1 79.25,96.95 79.275,96.975 v4(81,96.975) ; C9.1 81.57,85.445 82.619,85.445 82.646,85.472 ; U2.8 86.001,85.501 U2.49 ; 84.624,90.348 C12.1 ; v2(88.6,73.5) 88.612,73.488 88.612,71.662 J3.6 ; C10.1 89.75,82 ; U2.35 91.351,88.5 91.7,88.85 C11.1 91.9,89 92.126,89 v2(92.75,89) ; 100.2,88.823 100.51,88.823 ; C4.2 C4.2@101.9,75.643
  L1 (Signal) w0.5: v2(73.3,93.5) C16.1 ; v2(73.3,95.5) C15.1 ; v2(73.4,85.45) X1.2 ; v2(75.1,87) C5.2 ; v2(76.9,82.3) X1.4 ; C17.1 v2(78,91.25) 78.019,91.269 78.819,91.269 79.25,91.7 ; v2(78.851,87.625) C7.1 80.1,87.625 80.35,87.875 C8.1 ; C6.2 79.934,84.55 79.984,84.6 80.482,84.6 80.743,84.861 v2(80.743,84.914) 80.77,84.914 81.182,85.325 81.45,85.325 C9.1 ; v2(81.45,92.099) 81.45,92.126 81.5,92.176 C18.1 ; v2(83.874,94.25) R6.2 ; C13.1 88.6,79.4 v2(89.626,79.4) 89.626,79.427 89.75,79.551 C10.1 ; v3(90.5,99.025) 91.225,99.75 C14.1 ; v2(91.75,81.602) R5.2 ; J2.5 v3(93.98,98.441) ; v2(99.7,88.823) 100.2,88.823 ; R1.1 v2(104.25,78.448)
  other v1: 93.473,67.599 96.063,67.599 98.462,67.599 76.719,68 78,68 76.665,70 78,70 71.5,72 73.133,72 75.002,72 76.719,72 78,72.063 79,73.4 71.5,73.5 73.198,73.5 74.991,73.5 77,73.5 91,74 71.5,74.82 82.828,75 89.626,75 78,75.727 88.612,76.225 90.75,76.225 71.5,76.278 80.75,77 82.828,77 76.19,77.142 88.5,77.95 90.25,77.95 71.7,78 73.371,78 82.828,79 71.7,79.5 73.371,79.5 92.75,79.551 102.1,80 103.45,80 105.05,80 78,80.8 79.984,80.8 82.828,81 102.1,81 103.45,81 105.05,81 92.75,81.041 73.4,82 94.027,82.229 79,82.801 95.305,83.499 95,85.311 92.6,85.975 93.8,85.975 73.4,87 98.09,88.952 96.1,89 99,90.515 100.2,92 92.75,92.372 102,93 104.14,93 93.98,93.75 97.758,93.853 102,95 104.14,95 102,97 104.316,97.019 85,99.025 86.613,99.025 78.75,100 81,100 83,100 100.1,100 88,100.245 85,101.012 86.6,101.012 89,101.325 100.1,101.48
  other v2: 101.2,76.9 102.1,76.9 99.123,78.077 98.748,79.034 98.748,79.906 97.75,82.087 99.25,82.087
IMU_CPOUT: C18.2 U3.20 | length 1.6
  L1 (Signal) w0.3: U3.20 C18.2
IMU_INT: U2.45 U3.12 | length 18.9
  L1 (Signal) w0.25: U3.12 75.625,93.5 74.592,92.467 74.592,90.348 74.739,90.202 80.5,90.202 83.273,92.975 84.625,92.975 85.5,92.099 U2.45
IMU_REGOUT: C16.2 U3.10 | length 1.8
  L1 (Signal) w0.3: C16.2 U3.10
IMU_SCL: R3.2 U2.42 U3.23 | length 17
  L1 (Signal) w0.25: U3.23 80.5,95.5 81,95 v2(87.875,95) ; U2.42 86.999,90.017 87.034,90.053 87.034,90.202 88.582,91.75 88.855,91.75 90.001,92.896 R3.2 90.025,93.774 90.025,94.854 89.879,95 v2(89.567,95)
  L4 (Signal) w0.25: v2(87.875,95) v2(89.567,95)
IMU_SDA: R4.2 U2.43 U3.24 | length 16.1
  L1 (Signal) w0.25: U3.24 88.566,96 88.875,95.691 R4.2 ; U2.43 86.501,90.647 88.875,93.022 R4.2
NetC3_2: 
NetC7_1: 
STM_BOOT0: R6.1 U2.44 | length 4.6
  L1 (Signal) w0.25: R6.1@85.626,93.25 86.502,93.25 86.502,92 86.001,91.499 U2.44
STM_LED_A: D2.A U2.26 | length 1.6
  L1 (Signal) w0.25: U2.26 D2.A
STM_LED_K: D2.K R5.1 | length 1.4
  L1 (Signal) w0.25: R5.1 D2.K
STM_NRST: C14.2 J2.3 R7.2 U2.7 | length 32.4
  L1 (Signal) w0.2: v2(80.5,85.876) cw(c80.802,85.574) 80.802,86.001 U2.7 ; v2(92.275,101.325) 92.71,101.325 93.21,100.825 C14.2
  L1 (Signal) w0.25: C14.2 R7.2 94.6,99.65 94.6,99.025 95.184,98.441 95.184,97.701 J2.3
  L4 (Signal) w0.2: v2(80.5,85.876) 80.5,88.846 84.026,92.372 89.621,92.372 91.095,93.846 91.095,100.245 92.175,101.325 v2(92.275,101.325)
STM_OSC_IN: C5.1 U2.5 X1.1 | length 8
  L1 (Signal) w0.2: X1.1 77,85.55 C5.1 79.36,87 79.434,86.925 82.795,86.925 82.808,86.939 82.909,86.939 82.969,86.999 U2.5
STM_OSC_OUT: C6.1 U2.6 X1.3 | length 11.1
  L1 (Signal) w0.2: X1.3 74.717,83.667 75.5,83.667 75.5,84.383 75.617,84.5 77.904,84.5 C6.1 78.934,85.876 79.557,86.499 U2.6
STM_PA4: J3.2 U2.14 | length 11.6
  L1 (Signal) w0.25: J3.2 83.625,72.175 83.825,72.375 83.909,72.375 84.055,72.521 84.055,81.889 84.464,82.298 84.464,82.447 84.5,82.483 U2.14
STM_PA5: J3.3 U2.15 | length 11.2
  L1 (Signal) w0.25: J3.3 84.994,71.769 84.994,82.795 U2.15
STM_PA6: J3.4 U2.16 | length 11.4
  L1 (Signal) w0.25: U2.16 85.5,82.483 85.536,82.447 85.536,82.434 85.536,82.162 86.131,81.567 J3.4@86.131,71.656
STM_PA7: J3.5 U2.17 | length 12
  L1 (Signal) w0.25: U2.17 86.001,82.483 86.036,82.447 86.036,82.298 86.308,82.026 86.776,82.026 87.376,81.425 J3.5
STM_SWCLK: J2.4 U2.37 | length 10.7
  L1 (Signal) w0.25: U2.37 89.501,90.009 90.742,91.25 93.5,91.25 95.25,93 J2.4
STM_SWDIO: J2.2 U2.34 | length 12.9
  L1 (Signal) w0.25: U2.34 93.472,88 96.52,91.048 J2.2
STM_SWO: J2.6 U2.40 | length 9.7
  L1 (Signal) w0.25: U2.40 88.005,89.705 88.005,90.172 88.691,90.858 89.567,90.858 93.98,95.271 J2.6
STM_VCAP1: C13.2 U2.22 | length 1.8
  L1 (Signal) w0.25: 88.5,82.12 U2.22
  L1 (Signal) w0.3: C13.2 88.5,82.12
USB_D_N: D1.K J1.2 R1.2 U2.32 | length 29.5
  L1 (Signal) w0.261: U2.32 90.514,86.999 90.544,86.969 95.785,86.969 95.881,86.873 96.1,86.873 ; v5(96.537,84.34) 96.1,84.778 96.1,86.873 ; v5(101.089,82.087) 101.089,78.93 101.75,78.27 102.521,78.27 103.45,77.341 103.45,76.559 104.175,76.559 R1.2 D1.K ; J1.2 96.1,86.873
  L4 (Signal) w0.261: v5(96.537,84.34) 97.073,83.805 100.51,83.805 101.089,83.225 v5(101.089,82.087)
USB_D_P: J1.3 U2.33 | length 11.3
  L1 (Signal) w0.261: U2.33 101.457,87.5 J1.3
VBUS: C1.2 FB1.2 J1.1
pads on no net: J1.4 J1.6 J2.MH J3. U2.2 U2.3 U2.4 U2.10 U2.11 U2.12 U2.13 U2.18 U2.19 U2.20 U2.21 U2.25 U2.27 U2.28 U2.29 U2.30 U2.31 U2.38 U2.39 U2.41 U2.46 U3.2 U3.3 U3.4 U3.5 U3.6 U3.7 U3.14 U3.15 U3.16 U3.17 U3.19 U3.21 U3.22

## Polygon pours and split planes (outlines as drawn)
+3V3 on L1 (Signal) "+3V3_L01_P005" (solid, pour order 5): 98.8,70.504 98.125,69.875 97.971,69.825 96.975,69.825 95.15,69.825 94.523,70.452 94.523,71.848 96,73.325 96,78.113 96.05,78.163 97.591,78.163 97.591,75.359 98.5,74.45 102.7,74.45 103,74.15 103,72.493 99.593,72.493 98.8,71.7
GND on L1 (Signal) "GND_L01_P008" (solid, pour order 8): 99.823,83.1 97.4,83.1 97.4,80.702 97.198,80.5 96.823,80.5 96.823,78.689 97.05,78.462 97.938,78.462 98.323,78.077 98.323,76.511 98.537,76.511 98.748,76.3 100.6,76.3 100.6,75.1 101,74.7 102.5,74.7 102.5,74.8 102.85,75.3 102.85,75.45 102.85,77.033 102.4,77.483 100.6,77.483 100.6,77.698 99.85,78.448 99.85,79.034 99.498,79.034 99.5,79.036 99.85,82.777 99.834,82.793 99.85,82.777 99.853,82.812
+5 on L1 (Signal) "+5_L01_P004" (solid, pour order 4): 96.025,78.525 95.625,78.525 95.6,76.375 95.45,76.225 93.755,76.225 93.497,76.483 93.525,76.511 93.525,78.175 94.1,78.75 94.1,80.952 97.75,84.602 97.75,83.805 97.295,83.35 97.175,83.35 97.175,82.275 96.8,81.9 96.8,81.303 96.275,80.778 96.275,79.034
+5 on L1 (Signal) "+5_L01_P003" (solid, pour order 3): 98.275,84.662 98.3,84.637 98.611,84.637 98.611,83.584 98.604,83.577 98.275,83.577 98.275,83.35 97.175,83.35 97.175,85.975 98.275,85.975
VBUS on L1 (Signal) "VBUS_L01_P000" (solid, pour order 0): 102.344,85.875 102.344,86.504 98.675,86.504 98.675,83.375 98.725,83.325 99.85,83.325 99.925,83.4 99.925,85.875
GND on L2 (GND) "GND_L02_P021" (solid, pour order 21): 91.9,102.5 91.8,102.4 71.3,102.4 70.6,101.7 70.6,67.5 71.1,67 71.2,67.1 105.2,67.1 105.7,67.6 105.6,67.7 105.6,101.4 105.5,101.4 104.7,102.2
GND on L3 (GND) "GND_L03_P023" (solid, pour order 23): 91.9,102.5 91.8,102.4 71.3,102.4 70.6,101.7 70.6,67.5 71.1,67 71.2,67.1 105.2,67.1 105.7,67.6 105.6,67.7 105.6,101.4 105.5,101.4 104.7,102.2

## Silkscreen, mask and mechanical layers (free items; w line width, h text height)
Top Overlay:
  drawing of 42 lines, arcs and shapes, not listed
Mechanical 1:
  lines w0.254: 106,67.895 106,101.48 ccw(c104.73,101.48) 104.73,102.75 104.024,102.75 71.52,102.75 ccw(c71.52,101.48) 70.25,101.48 70.25,101.23 70.25,67.77 ccw(c71.27,67.77) 71.27,66.75 104.98,66.75 ccw(c104.98,67.77) 106,67.77 106,68.02

## Text inside footprints (layer, text, board x,y; h text height)
D1: Mechanical 13 "+" at 104.858,72.933 h0.5 r270
D2: Mechanical 13 "+" at 90.367,84.508 h0.5